# Altium PCB Kill_Board.PcbDoc
Units mil, origin at the board's own origin, x right, y up, seen from the top; angles counter-clockwise.
Board outline 3085 x 2870 mil, 2 copper layers (Top Layer, Bottom Layer); 86 components, 63 nets, 303 pads, 77 vias.
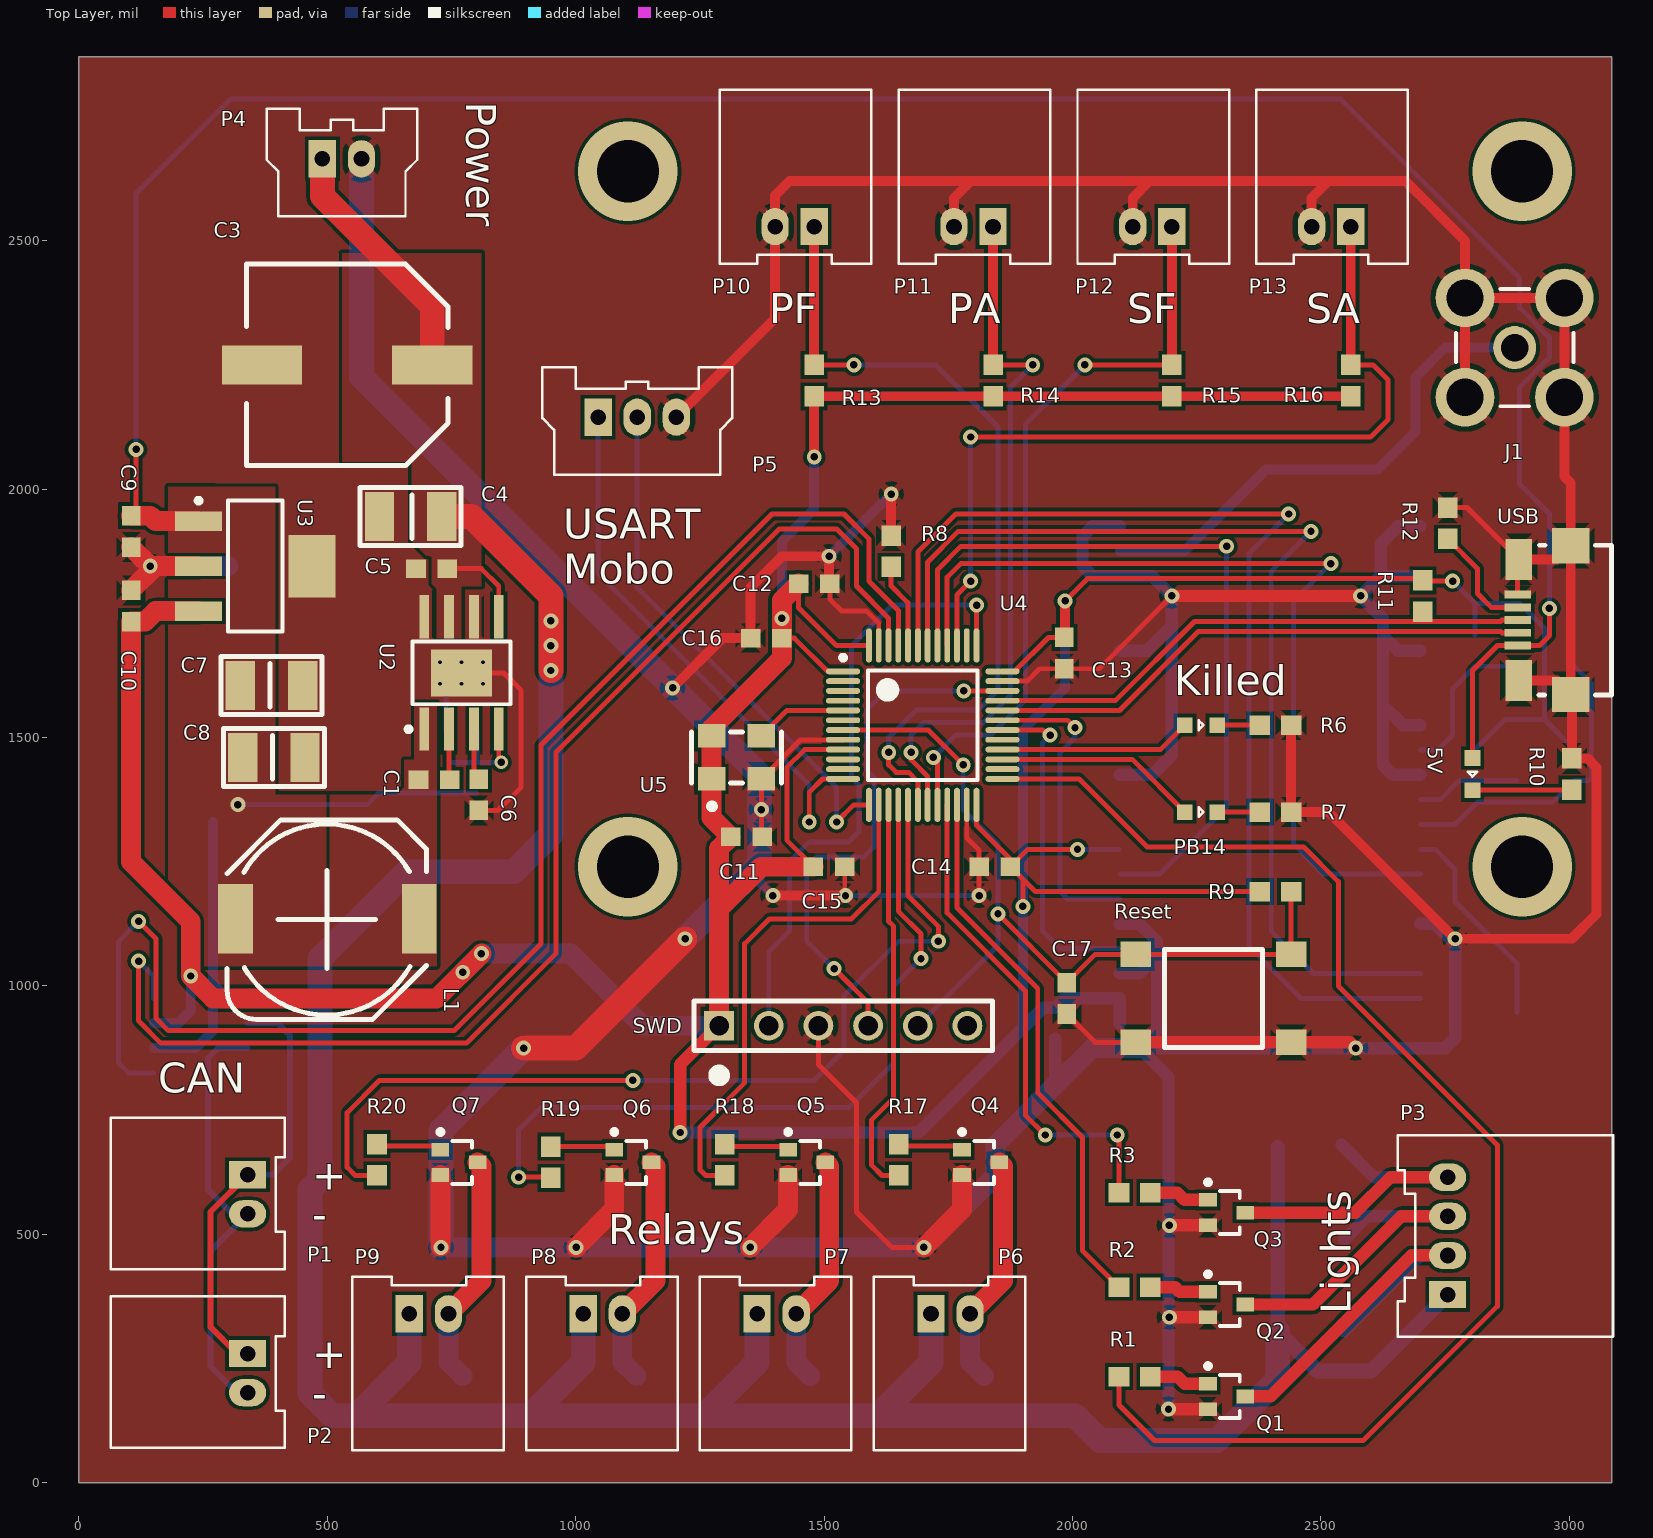
[diagram p0: Top Layer view]
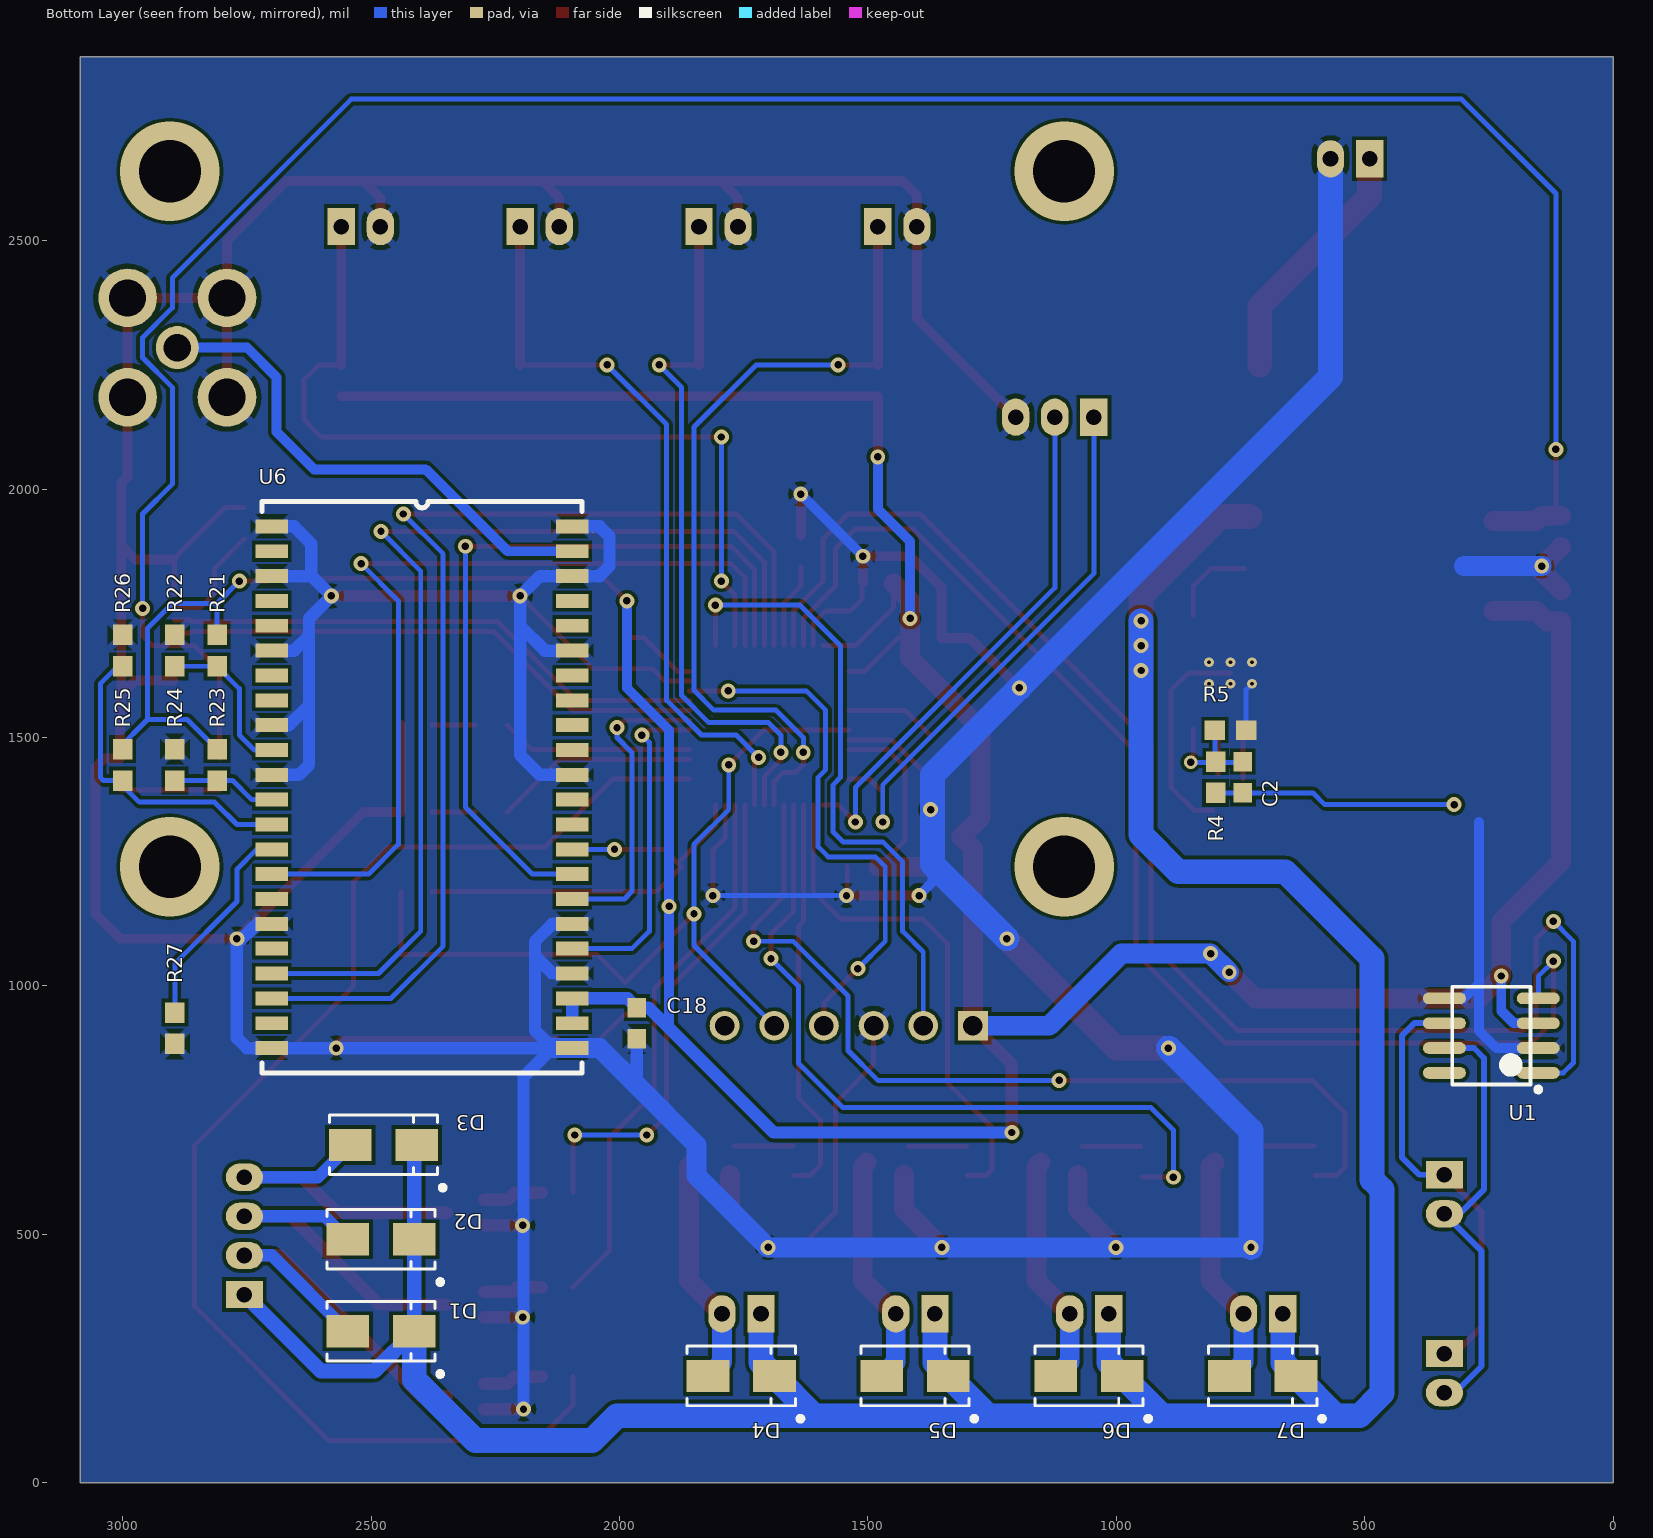
[diagram p1: Bottom Layer view, seen from below]

## Layer stack, top to bottom
Top Solder: solder mask 0.4, Solder Resist, Dk 3.5
Top Layer: signal copper 1.4
Dielectric 1: dielectric 12.6, FR-4, Dk 4.8
Bottom Layer: signal copper 1.4
Bottom Solder: solder mask 0.4, Solder Resist, Dk 3.5

## Board outline
0,0 0,2870 3085,2870 3085,0

## Design rules (kind name [scope] priority, off if disabled: settings)
Clearance [All] p1: gap=7
DiffPairsRouting [All] p1: maxlimit=10 minlimit=10 mostfreqgap=10 toplayer_minwidth=10 toplayer_maxwidth=20 toplayer_prefwidth=10 bottomlayer_minwidth=10 bottomlayer_maxwidth=20 bottomlayer_prefwidth=10 maxuncoupledlength=500
PolygonConnect [All] p1: connectstyle=Relief reliefconductorwidth=15 reliefentries=4 polygonreliefangle="45 Angle" airgapwidth=10
RoutingVias [All] p1: holewidth=15 width=30 viastyle="Through Hole" minholewidth=15 minwidth=30 maxholewidth=28 maxwidth=50
SolderMaskExpansion [All] p1: expansion=4
Width [All] p1: maxlimit=50 minlimit=10 preferedwidth=10
29 further rules are at their usual default settings.

## Classes and differential pairs
component class U_Relays: D4 D5 D6 D7 P6 P7 P8 P9 Q4 Q5 Q6 Q7 R17 R18 R19 R20
component class U_Processor: 5V C11 C12 C13 C14 C15 C16 C17 Killed PB14 R6 R7 R8 R9 R10 R11 R12 Reset SWD U4 U5 USB
component class U_Power: C1 C2 C3 C4 C5 C6 C7 C8 C9 C10 L1 P4 R4 R5 U2 U3
component class U_Linx: C18 J1 R21 R22 R23 R24 R25 R26 R27 U6
component class U_Lights: D1 D2 D3 P3 Q1 Q2 Q3 R1 R2 R3
component class U_CAN: P1 P2 U1
component class Kill_Board_Top: P5 P10 P11 P12 P13 R13 R14 R15 R16
differential pair USB: +USB_P -USB_N

## Components (designator, comment, footprint, x,y, rotation, side; value= is the part's Value field where it differs from the comment)
5V "LED" LED0603 2805,1426.5 r270 top
C1 "Cap" CAPC0603 715,1415 r180 top
C2 "Cap" CAPC0603 745,1420 r90 bottom
C3 "EEHZA1H101P" EEHZA1H101P 540,2250 r270 top
C4 "Cap" CAP1210 730.98,1945 r0 top
C5 "Cap" CAPC0603 710,1840 r180 top
C6 "Cap" CAPC0603 805,1385 r270 top
C7 "Cap" CAP1210 324.21,1605 r180 top
C8 "Cap" CAP1210 329.02,1460 r180 top
C9 "Cap" CAPC0603 105,1915 r270 top
C10 "Cap" CAPC0603 105,1765 r90 top
C11 "Cap" CAPC0603 1343.5,1300 r0 top
C12 "Cap" CAPC0603 1480,1810 r180 top
C13 "Cap" CAPC0603 1983.5,1670 r270 top
C14 "Cap" CAPC0603 1843.5,1240 r180 top
C15 "Cap" CAPC0603 1510,1240 r0 top
C16 "Cap" CAPC0603 1383.5,1700 r180 top
C17 "Cap" CAPC0603 1988.5,975 r270 top
C18 "Cap" CAPC0603 1965,925 r270 bottom
D1 "S1B-13-F" SMASeries 2480,305 r0 bottom
D2 "S1B-13-F" SMASeries 2480,490 r0 bottom
D3 "S1B-13-F" SMASeries 2475,680 r0 bottom
D4 "S1B-13-F" SMASeries 1755,215 r0 bottom
D5 "S1B-13-F" SMASeries 1405,215 r0 bottom
D6 "S1B-13-F" SMASeries 1055,215 r0 bottom
D7 "S1B-13-F" SMASeries 705,215 r0 bottom
J1 "COAX-F-LINX" MCX5.08-H5-EDITED 2890,2285 r0 top
Killed "LED" LED0603 2258.5,1525 r0 top (schematic designator "Kill Status")
L1 "MSS1048-563MLB" MSS1048-563MLB 500,1135 r270 top
P1 "2-pin Horz Sherlock" MOLEX-HDR-1X2-SHERLOCK-HORZ 339.49,620 r90 top
P2 "2-pin Horz Sherlock" MOLEX-HDR-1X2-SHERLOCK-HORZ 339.49,260 r90 top
P3 "MOLEX-HDR-1x4-SHERLOCK_RA" MOLEX-HDR-1X4-SHERLOCK-RA 2755,378.78 r270 top
P4 "2-pin Vert Sherlock" MOLEX-HDR-1X2-SHERLOCK-VERT 490,2665 r180 top
P5 "MOLEX-HDR-1x3-SHERLOCK_VERT" MOLEX-HDR-1X3-SHERLOCK-VERT 1045,2145 r180 top
P6 "2-pin Horz Sherlock" MOLEX-HDR-1X2-SHERLOCK-HORZ 1715,340 r180 top
P7 "2-pin Horz Sherlock" MOLEX-HDR-1X2-SHERLOCK-HORZ 1365,340 r180 top
P8 "2-pin Horz Sherlock" MOLEX-HDR-1X2-SHERLOCK-HORZ 1015,340 r180 top
P9 "2-pin Horz Sherlock" MOLEX-HDR-1X2-SHERLOCK-HORZ 665,340 r180 top
P10 "2-pin Horz Sherlock" MOLEX-HDR-1X2-SHERLOCK-HORZ 1480,2528.5 r0 top
P11 "2-pin Horz Sherlock" MOLEX-HDR-1X2-SHERLOCK-HORZ 1840,2528.5 r0 top
P12 "2-pin Horz Sherlock" MOLEX-HDR-1X2-SHERLOCK-HORZ 2200,2528.5 r0 top
P13 "2-pin Horz Sherlock" MOLEX-HDR-1X2-SHERLOCK-HORZ 2560,2528.5 r0 top
PB14 "LED" LED0603 2258.5,1350 r0 top
Q1 "BSN20-7" SOT-323 2310,173.78 r0 top
Q2 "BSN20-7" SOT-323 2310,358.78 r0 top
Q3 "BSN20-7" SOT-323 2310,543.78 r0 top
Q4 "BSN20-7" SOT-323 1815,645 r0 top
Q5 "BSN20-7" SOT-323 1465,645 r0 top
Q6 "BSN20-7" SOT-323 1115,645 r0 top
Q7 "BSN20-7" SOT-323 765,645 r0 top
R1 "Res" RES0603 2125,213.78 r0 top
R2 "Res" RES0603 2125,393.78 r0 top
R3 "Res" RES0603 2125,583.78 r0 top
R4 "Res" RES0603 800,1420 r90 bottom (schematic designator R1)
R5 "Res" RES0603 770,1515 r180 bottom (schematic designator R2)
R6 "Res" RES0603 2408.5,1525 r180 top
R7 "Res" RES0603 2408.5,1350 r180 top
R8 "Res" RES0603 1635,1875 r90 top
R9 "Res" RES0603 2408.5,1190 r0 top
R10 "Res" RES0603 3005,1426.5 r270 top
R11 "Res" RES0603 2705,1785 r270 top
R12 "Res" RES0603 2755,1931.5 r90 top
R13 "Res" RES0603 1480,2218.5 r270 top
R14 "Res" RES0603 1840,2218.5 r270 top
R15 "Res" RES0603 2200,2218.5 r270 top
R16 "Res" RES0603 2560,2218.5 r270 top
R17 "Res" RES0603 1650,650 r90 top
R18 "Res" RES0603 1300,650 r90 top
R19 "Res" RES0603 950,645 r90 top
R20 "Res" RES0603 600,650 r90 top
R21 "Res" RES0603 2810,1675 r90 bottom
R22 "Res" RES0603 2895,1675 r270 bottom
R23 "Res" RES0603 2810,1445 r90 bottom
R24 "Res" RES0603 2895,1445 r270 bottom
R25 "Res" RES0603 3000,1445 r90 bottom
R26 "Res" RES0603 3000,1675 r270 bottom
R27 "Res" RES0603 2895,915 r90 bottom
Reset "Button" PTS645xxxxSMTR92 2283.5,975 r180 top
SWD "SWD" SWD_STM32 1288.5,920 r90 top
U1 "SN65HVD230DR" SOIC-8pin 245,900 r0 bottom
U2 "LMR23610ADDAR" LMR23610ADDAR 770,1630 r90 top
U3 "3.3V LDO Reg" SOT23-4n 355,1845 r0 top
U4 "STM32F072CB" STM32F072CB 1698.5,1525 r0 top
U5 "636L3C008M" 636L3C 1323.5,1460 r0 top
U6 "TRM-900-NT" TRM-900-NT 2700,1925 r180 bottom
USB "USB Micro" 10118192-0001LF 2875,1736.5 r90 top

## Footprints (in the part's own frame and the unit in brackets; to place one, negate y for a bottom-side part, rotate by r counter-clockwise, add the part's x,y. Pads: shape width x height; smd on the part's side, far side on the other; paste and mask are expansions set on the pad)
636L3C [mm]
  rect 1.4x1.2 smd: 1(-1.27,-1.1) 2(1.27,-1.1) 3(1.27,1.1) 4(-1.27,1.1)
  silkscreen extent -2.3,-2.65 2.3,1.3, body extent -2.5,-1.6 2.5,1.6, height 2
10118192-0001LF [mm] "USB Micro-B Recepticle"
  rect 0.4x1.35 smd: 1(-1.3,-0.533) 2(-0.65,-0.533) 3(0,-0.533) 4(0.65,-0.533) 5(1.3,-0.533)
  rect 1.8x1.9 smd: SHD(-3.8,-3.248) SHD(3.8,-3.248)
  rect 2.1x1.35 smd: SHD(-3.1,-0.584) SHD(3.1,-0.598)
  silkscreen extent -3.82,-5.33 3.82,-1.63, body extent -3.96,-5.98 3.96,-0.32, height 3.09
CAP1210 [mm]
  rect 1.5x2.5 smd: 1(-0.02,0) 2(-3.2,0)
  silkscreen extent -4.2,-1.48 0.97,1.48, body extent -3.22,-1.25 0,1.26, height 2.5
CAPC0603 [mm] "Chip Capacitor, 2-Leads, Body 1.60x0.80mm, IPC Medium Density"
  rect 1x0.95 smd: 1(-0.8,0) 2(0.8,0)
  body extent -0.88,-0.48 0.87,0.48, height 0.8
EEHZA1H101P [mm] "CAP ALUM POLY HYB 100UF 50V SMD"
  rect 2x4.1 smd: 1(0,4.35) 2(0,-4.35)
  silkscreen extent -5.15,-5.15 5.15,5.15, body extent -5.24,-5.99 5.25,5.99, height 10.54
LED0603 [mm] "Chip LED, 2-Leads, Body 1.60x0.80mm, IPC Medium Density"
  rect 0.8x0.8 smd: A(-0.825,0) C(0.825,0)
  silkscreen extent -0.13,-0.25 0.13,0.25, body extent -0.88,-0.48 0.87,0.47, height 0.8
LMR23610ADDAR [mm] "IC REG BUCK ADJ 1A SYNC 8SOPWRPD"
  rect 2.2x0.5 smd: 1(-2.875,1.905) 2(-2.875,0.635) 3(-2.875,-0.635) 4(-2.875,-1.905) 5(2.875,-1.905) 6(2.875,-0.635) 7(2.875,0.635) 8(2.875,1.905)
  rect 2.4x3.1 smd: 9(0,0)
  silkscreen extent -3,-2.5 1.6,2.83, body extent -2,-2.5 2,2.5, height 1.7
MCX5.08-H5-EDITED [mm] "Connector; RF Coaxial, MCX, Thru-Hole; 5 Position; Edited for hole size 0.2mm larger"
  round 2.2 hole 1.4: 1(0,0)
  round 3 hole 1.9: 2(-2.54,-2.54) 3(2.54,-2.54) 4(2.54,2.54) 5(-2.54,2.54)
  silkscreen extent -3,-3 3,3
MOLEX-HDR-1X2-SHERLOCK-HORZ [mm]
  rect 1.397x1.905 hole 0.8: 1(0,0)
  oval 1.397x1.905 hole 0.8: 2(-2,0)
  silkscreen extent -4.83,-1.9 2.92,6.99, body extent -4.83,-1.91 2.87,8.59, height 5.54
MOLEX-HDR-1X2-SHERLOCK-VERT [mm]
  rect 1.397x1.905 hole 0.8: 1(0,0)
  oval 1.397x1.905 hole 0.8: 2(-2,0)
  silkscreen extent -4.85,-2.55 2.85,2.95, body extent -4.87,-2.59 2.83,2.96, height 8.5
MOLEX-HDR-1X3-SHERLOCK-VERT [mm]
  rect 1.397x1.905 hole 0.8: 1(0,0)
  oval 1.397x1.905 hole 0.8: 2(-2,0) 3(-4,0)
  silkscreen extent -6.85,-2.55 2.85,2.95, body extent -6.88,-2.57 2.82,2.98, height 8.57
MOLEX-HDR-1X4-SHERLOCK-RA [mm]
  rect 1.397x1.905 hole 0.8: 1(0,0)
  oval 1.397x1.905 hole 0.8: 2(-2,0) 3(-4,0) 4(-6,0)
  silkscreen extent -8.15,-2.55 2.15,8.46, body extent -8.17,-1.98 2.13,8.52, height 5.54
MSS1048-563MLB [mm] "FIXED IND 56UH 1.7A 126 MOHM"
  rect 3.56x1.78 smd: 1(0,4.7) 2(0,-4.7)
  silkscreen extent -5.06,-5.13 5.14,5.07, body extent -5.1,-5.15 5.1,5.15, height 5
PTS645xxxxSMTR92 [mm] "PTS645 Series SMT 6 mm Tactile Switch"
  rect 1.555x1.3 smd: A(-3.975,2.25) A(3.975,2.25) B(-3.975,-2.25) B(3.975,-2.25)
  silkscreen extent -2.5,-2.5 2.5,2.5, body extent -3,-3 3,3, height 4.5
RES0603 [mm] "Chip Resistor, 2-Leads, Body 1.60x0.80mm, IPC Medium Density"
  rect 1.05x1 smd: 1(-0.8,0) 2(0.8,0)
  body extent -0.88,-0.48 0.87,0.47, height 0.8
SMASeries [mil]
  rect 86x65 smd: A(67,0) C(-67,0)
  silkscreen extent -124,-60 109,91, body extent -104,-55 104,55, height 92
SOIC-8pin [mm] "For 296-1345-1-ND"
  oval 2.2x0.6 smd: 1(-2.4,1.905) 2(-2.4,0.635) 3(-2.4,-0.635) 4(-2.4,-1.905) 5(2.4,-1.905) 6(2.4,-0.635) 7(2.4,0.635) 8(2.4,1.905)
  silkscreen extent -2.52,-2.5 2,2.88, body extent -2,-2.5 2,2.5, height 1.75
SOT23-4n [mm] "SOT223, 4-Leads, Body 6.50x7.00mm (avg), Pitch 2.30mm, IPC Medium Density"
  rect 2.4x1 smd: 1(-2.9,2.3) 2(-2.9,0) 3(-2.9,-2.3)
  rect 2.4x3.2 smd: 4(2.9,0)
  silkscreen extent -3.02,-3.35 1.4,3.47, body extent -1.85,-3.35 1.85,3.35, height 1.7
SOT-323 [mm] "SOT23, 3-Leads, Body 2.00x2.20mm, Pitch 0.65mm, IPC Medium Density"
  rect 0.9x0.7 smd: 1(-0.95,0.65) 2(-0.95,-0.65) 3(0.95,0)
  silkscreen extent -1.07,-1.1 0.67,1.67, body extent -0.67,-1.1 0.67,1.1, height 1
STM32F072CB [mm] "TSQFP, 48-Leads, Body 7.00x7.00mm, Pitch 0.50mm, IPC Medium Density"
  oval 1.75x0.3 smd: 1(-4.075,2.75) 2(-4.075,2.25) 3(-4.075,1.75) 4(-4.075,1.25) 5(-4.075,0.75) 6(-4.075,0.25) 7(-4.075,-0.25) 8(-4.075,-0.75) 9(-4.075,-1.25) 10(-4.075,-1.75) 11(-4.075,-2.25) 12(-4.075,-2.75) 25(4.075,-2.75) 26(4.075,-2.25) 27(4.075,-1.75) 28(4.075,-1.25) 29(4.075,-0.75) 30(4.075,-0.25) 31(4.075,0.25) 32(4.075,0.75) 33(4.075,1.25) 34(4.075,1.75) 35(4.075,2.25) 36(4.075,2.75)
  oval 0.3x1.75 smd: 13(-2.75,-4.075) 14(-2.25,-4.075) 15(-1.75,-4.075) 16(-1.25,-4.075) 17(-0.75,-4.075) 18(-0.25,-4.075) 19(0.25,-4.075) 20(0.75,-4.075) 21(1.25,-4.075) 22(1.75,-4.075) 23(2.25,-4.075) 24(2.75,-4.075) 37(2.75,4.075) 38(2.25,4.075) 39(1.75,4.075) 40(1.25,4.075) 41(0.75,4.075) 42(0.25,4.075) 43(-0.25,4.075) 44(-0.75,4.075) 45(-1.25,4.075) 46(-1.75,4.075) 47(-2.25,4.075) 48(-2.75,4.075)
  silkscreen extent -4.2,-2.8 2.8,3.57, body extent -3.5,-3.5 3.5,3.5, height 1.6
SWD_STM32 [mil] "SWD connector matching the pinout on STM Discovery Boards"
  rect 60x60 hole 39.37: 1(0,0)
  round 60 hole 39.37: 2(0,-100) 3(0,-200) 4(0,-300) 5(0,-400) 6(0,-500)
  silkscreen extent -110,-550 50,50
TRM-900-NT [mil] "RF TXRX MODULE ISM<1GHZ"
  rect 65x28 smd: 1(0,0) 2(0,-50) 3(0,-100) 4(0,-150) 5(0,-200) 6(0,-250) 7(0,-300) 8(0,-350) 9(0,-400) 10(0,-450) 11(0,-500) 12(0,-550) 13(0,-600) 14(0,-650) 15(0,-700) 16(0,-750) 17(0,-800) 18(0,-850) 19(0,-900) 20(0,-950) 21(0,-1000) 22(0,-1050) 23(605,-1050) 24(605,-1000) 25(605,-950) 26(605,-900) 27(605,-850) 28(605,-800) 29(605,-750) 30(605,-700) 31(605,-650) 32(605,-600) 33(605,-550) 34(605,-500) 35(605,-450) 36(605,-400) 37(605,-350) 38(605,-300) 39(605,-250) 40(605,-200) 41(605,-150) 42(605,-100) 43(605,-50) 44(605,0)
  silkscreen extent -20,-1100 625,50

## Part data
C3: "CAP ALUM POLY HYB 100UF 50V SMD"
D1 D2 D3 D4 D5 D6 D7: library part Diode, "Standard Diode Template"
J1: "RF Coaxial PCB Connector, MCX; Thru-Hole, Right-Angle Mount Socket, Blunt Post Terminal, 50 Ohm Impedance, Edited for 0.2mm larger holes"
L1: "FIXED IND 56UH 1.7A 126 MOHM"
P1 P2 P6 P7 P8 P9 P10 P11 P12 P13: library part MOLEX-HDR-1x2-SHERLOCK_RA, "Header, Molex, 2mm Pitch Sherlock Header, Single Row, Horizontal, 2 Circuits, Length 3.3mm,  0353630260"
P3: "Header, Molex, 2mm Pitch Sherlock Header, Single Row, Horizontal, 4 Circuits, Length 3.3mm"
P4: library part MOLEX-HDR-1x2-SHERLOCK_VERT, "Header, Molex, 2mm Pitch Sherlock Header, Single Row, Vertical, 2 Circuits, Length 3.3mm, 0353620250"
P5: "Header, Molex, 2mm Pitch Sherlock Header, Single Row, Vertical, 3 Circuits, Length 3.3mm, 0353620376"
Q1 Q2 Q3 Q4 Q5 Q6 Q7: library part NMOSFET, "NMOSFET Template"
Reset: "SPST Button"
SWD: library part SWD_STM32, "SWD connector matching the pinout on STM Discovery Boards"
U1: "IC TXRX CAN 1MBPS 3.3V 8SOIC"
U2: "IC REG BUCK ADJ 1A SYNC 8SOPWRPD"
U3: library part LM3940IMPX-3.3, "IC REG LDO 3.3V 1A SOT223"
U4: "MCU 32BIT 128KB FLASH 48LQFP"
U5: library part 636L3C, "HCMOS/TTL Clock Oscillator"
U6: "RF TXRX MODULE ISM<1GHZ"
USB: "USB Mini B Metal Shield SMT"

## Via types
v1: diameter 30, hole 15, Top Layer to Bottom Layer, 66 vias
v2: diameter 19.68, hole 7.87, Top Layer to Bottom Layer, 6 vias
v3: diameter 200, hole 125, Top Layer to Bottom Layer, 4 vias
v4: diameter 27, hole 15, Top Layer to Bottom Layer, 1 vias

## Nets (pads, with @x,y where several pads share a name; then routed paths per layer and width w, separated by ;. In a path a pad name is that pad's centre, name@x,y a point inside that pad or via, vN(x,y) a via of type N, cw(c..) or ccw(c..) an arc to the next point about the centre after c; other vN are vias at no path point)
3V3: C10.1 C11.1 C12.2 C13.1 C14.1 C15.1 C16.1 C18.1 R9.1 R11.1 R13.2 R14.2 R15.2 R16.2 R21.2 R23.2 R25.2 SWD.1 U1.3 U3.3 U4.1 U4.9 U4.24 U4.36 U4.48 U5.1 U5.4 U6.24 U6.25 U6.31 | length 10702.9
  Top Layer w10: C16.1 1440,1700 1506.73,1633.27 U4.1 ; C12.2 1448.5,1761.5 1524.57,1685.43 U4.48 ; C15.1 1425,1293.5 1425,1440 1460.79,1475.79 U4.9 ; U4.24 1806.77,1323.23 C14.1@1875,1255 ; U4.36 1883.27,1633.27 1951.5,1701.5 C13.1 ; v1(1900,1160) 1900,1215 ; v1(1985,1775) 2030,1820 R11.1@2705,1820 ; v1(2010,1275) 1910,1275 C14.1 1925,1190 R9.1 ; R11.1@2706.5,1815 v1(2765,1815)
  Top Layer w20: v1(1480,2065) R13.2 R14.2 R15.2 R16.2 ; C13.1@1985,1702.99 v1(1985,1775)
  Top Layer w25: v1(1210,705) 1210,841.5 SWD.1
  Top Layer w40: U3.3 154.45,1754.45 133.5,1733.5 C10.1 105,1250 225,1130 v1(225,1020) 270,975 720,975 v1(810,1065) ; SWD.1 1288.5,1155 ; C12.2 1415,1776.5 v1(1415,1740) C16.1 1415,1660 1273.5,1518.5 U5.4 U5.1 1273.5,1338.5 C11.1 1288.5,1276.5 1288.5,1155 ; C15.1 1373.5,1240 1288.5,1155
  Bottom Layer w10: v1(2010,1275) U6.31 ; v1(2765,1815) 2810,1770 ; R23.2 2870,1536.5 2950,1536.5 ; R21.2 2810,1770 ; R25.2@3010,1476.5 2950,1536.5 ; 2810,1770 2900,1770 2950,1720 2950,1536.5
  Bottom Layer w20: U1.3 200,925 225,950 v1(225,1020) ; v1(1415,1740) 1415,1895 1480,1960 v1(1480,2065) ; 1875,890 1900,915 v1(1900,1160) 1900,1515 1985,1600 v1(1985,1775)
  Bottom Layer w25: v1(1210,705) 1690,705 1875,890 1941.5,956.5 C18.1 1983.5,975 U6.25 U6.24
  Bottom Layer w40: v1(772.5,1027.5) v1(810,1065) 990,1065 1135,920 SWD.1
5V: 5V.A C2.1 C7.1 C8.1 C9.1 L1.2 R4.1 U3.1 USB.1 | length 5436
  Top Layer w10: C9.1@115,1956.5 v1(115,2080) ; 5V.A 2805,1635 2855.31,1685.31 USB.1 2940.31,1685.31 2960,1705 v1(2960,1760)
  Top Layer w40: C9.1 143.5,1946.5 154.45,1935.55 U3.1
  Bottom Layer w10: v1(115,2080) 115,2595 305,2785 2540,2785 2900,2425 2900,2365 2960,2305 2960,2265 2900,2205 2900,2010 2960,1950 v1(2960,1760) ; v1(320,1365) 580,1365 603.5,1388.5 C2.1 R4.1
24V: C3.1 C4.1 C5.1 D1.C D2.C D3.C D4.C D5.C D6.C D7.C P3.1 P4.1 P6.1 P7.1 P8.1 P9.1 U2.5 U2.7 | length 6994.3
  Top Layer w10: C5.1 810,1840 845,1805 U2.5@845,1744.69
  Top Layer w50: P4.1 490,2590 711.26,2368.74 C3.1 ; C4.1 790,1945 950,1785 v1(950,1635) v1(950,1685)
  Bottom Layer w30: D3.C@2413,675 D2.C D1.C 2493,225 2601.22,225 P3.1
  Bottom Layer w50: P9.1 665,242 D7.C 558,135 ; v1(950,1735) 950,1305 875,1230 660,1230 485,1055 485,610 465,590 465,180 510,135 558,135 ; P8.1 1015,242 D6.C 908,135 ; P7.1 1365,242 D5.C 1258,135 ; P6.1 1715,242 D4.C 1608,135 ; D1.C 2413,208 2290,85 2055,85 2005,135 1608,135 ; 558,135 908,135 ; 908,135 1258,135 ; 1258,135 1608,135
BLACK: D1.A P3.2 Q1.3 | length 796.3
  Top Layer w25: Q1.3 2398.78,173.78 2682.52,457.52 P3.2
  Bottom Layer w25: D1.A 2699.52,457.52 P3.2
BROWN: D2.A P3.3 Q2.3 | length 708.3
  Top Layer w25: Q2.3 2483.78,358.78 2661.26,536.26 P3.3
  Bottom Layer w25: D2.A 2593.26,536.26 P3.3
CHN_SEL0: R21.1 R22.2 U6.10 | length 319.6
  Bottom Layer w10: U6.10 2735,1475 2765,1505 2765,1598.5 R21.1 R22.2
CHN_SEL1: R23.1 R24.2 U6.12 | length 210.9
  Bottom Layer w10: U6.12 2740,1375 2778.5,1413.5 R24.2
CHN_SEL2: R25.1 R26.2 U6.13 | length 622.4
  Bottom Layer w10: U6.13 2770,1325 2815,1370 2966.5,1370 3010,1413.5 3038.5,1413.5 3045,1420 3045,1608.5 R26.2@3010,1643.5
CLK8MHZ: U4.5 U5.3 | length 185.8
  Top Layer w10: U5.3 1424.72,1554.53 U4.5
GND: C3.2 C4.2 C5.2 C6.2 C7.2 C8.2 C9.2 C10.2 C11.2 C12.1 C13.2 C14.2 C15.2 C16.2 C17.2 C18.2 J1.2 J1.3 J1.4 J1.5 P4.2 P5.3 P10.2 P11.2 P12.2 P13.2 Q1.2 Q2.2 Q3.2 Q4.2 Q5.2 Q6.2 Q7.2 R5.2 R6.1 R7.1 R8.2 R10.1 R12.2 R22.1 R24.1 R26.1 R27.1 Reset.A SWD.3 U1.2 U1.5 U2.6 U2.8 U2.9 U3.2 U3.4 U4.8 U4.23 U4.35 U4.47 U5.2 U6.1 U6.3 U6.6 U6.9 U6.11 U6.17 U6.22 U6.23 U6.26 U6.28 U6.34 U6.39 U6.42 U6.44 USB.5 USB.SHD | length 20523.9
  Top Layer w10: U2.9 855,1630 890,1595 890,1400 843.5,1353.5 C6.2 ; C11.2@1373.5,1301.5 U5.2 1452.28,1495.47 U4.8 ; SWD.3 1488.5,841.5 1565,765 1565,545 1636.22,473.78 v1(1700.91,473.78) ; C12.1 1511.5,1778.5 1535,1755 1585,1755 1609.92,1730.08 U4.47 ; C15.2 1541.5,1183.5 v1(1542.99,1182.01) ; U4.23 1787.09,1297.91 1812.01,1272.99 C14.2 v1(1812.01,1182.01) ; U4.35 1908.58,1613.58 1933.5,1638.5 C13.2 2053.5,1638.5 v1(2200,1785) ; C17.2 2045.59,886.42 Reset.A@2127.01,886.42 ; R12.2 2794.11,1962.99 USB.SHD@2898.56,1858.54 ; USB.5 USB.SHD@2896,1855.98
  Top Layer w20: v1(1195,1600) 1295,1700 C16.2 1352.01,1802.01 1415,1865 v1(1510,1865) C12.1@1510,1811.5 ; P5.3 1401.26,2343.78 P10.2 1401.26,2591.26 1430,2620 1795,2620 ; v1(1397.01,1182.01) v1(1542.99,1182.01) ; R8.2 v1(1635,1990) ; P11.2 1761.26,2586.26 1795,2620 ; P12.2 2121.26,2586.26 2155,2620 ; R6.1 R7.1 2515,1350 v1(2770,1095) 3005,1095 3055,1145 3055,1440 3037.01,1457.99 R10.1 3005,1584.78 USB.SHD@3002.89,1586.89 ; P13.2 2481.26,2586.26 2515,2620 ; J1.2 J1.5 ; USB.SHD@2898,1614.45 2975.33,1614.45 USB.SHD@3002.89,1586.89 ; USB.SHD@2898.56,1858.54 2975.33,1858.54 USB.SHD@3002.89,1886.1 ; 1795,2620 2155,2620 ; 2155,2620 2515,2620 ; 2515,2620 2670,2620 2790,2500 J1.5 ; J1.5 J1.4 J1.3 2990,2025 3002.89,2012.11 USB.SHD@3002.89,1886.1 ; USB.SHD@3002.89,1586.89 USB.SHD@3002.89,1886.1
  Top Layer w25: Reset.A@2127.01,886.42 2440,886.42 2558.58,886.42 v1(2570,875) ; v1(2193.19,148.19) Q1.2 ; v1(2195,333.19) Q2.2 ; v1(2195,518.19) Q3.2 ; v1(2200,1785) v1(2580,1785)
  Top Layer w40: C10.2 v1@153.5,1845 ; C9.2 v1(143.5,1845) U3.2 ; v1@727.6,474.96 Q7.2 ; v1(1000.91,473.78) 1077.6,550.47 Q6.2 ; v1(1350.91,473.78) 1427.6,550.47 Q5.2 ; v1(1700.91,473.78) 1777.6,550.47 Q4.2
  Top Layer w50: v1(895,875) 1000,875 v1(1220,1095)
  Bottom Layer w8: v2@726.69,1609.84 v2@727.44,1609.09 ; R5.2 738.5,1598.03
  Bottom Layer w10: v2(726.69,1608.35) 738.5,1596.53 R5.2 ; v1(1542.99,1182.01) v1(1812.01,1182.01)
  Bottom Layer w20: U1.2 235,875 270,910 270,1005 ; 270,1330 270,1005 ; U1.5 300,975 270,1005 ; 1370,1245 1370,1209.02 v1(1397.01,1182.01) ; v1(1510,1865) v1(1635,1990)
  Bottom Layer w25: 1965,800 C18.2 ; U6.26 2135,1025 2170,1060 ; U6.28 2135,1125 2170,1090 2170,1060 ; U6.34 2160,1425 2200,1465 2200,1725 ; U6.39 2150,1675 2200,1725 ; U6.44 2040,1925 2020,1905 2020,1845 2040,1825 U6.42 2160,1825 v1(2200,1785) 2200,1725 ; v1(2193.19,148.19) 2193.19,816.81 2135,875 ; U6.17 2730,1125 2770,1085 2770,895 2750,875 U6.22 v1(2570,875) 2135,875 ; U6.11 2645,1425 2625,1445 2625,1565 ; U6.9 2665,1525 2625,1565 ; U6.6 2655,1675 2625,1705 ; U6.3 2620,1825 ; U6.1 2655,1925 2620,1890 2620,1825 ; 2135,875 2170,910 2170,1060 ; 2620,1825 v1(2580,1785) 2625,1740 2625,1705 ; 2625,1565 2625,1705
  Bottom Layer w40: v1(143.5,1845) 300,1845 ; v1(728.78,473.78) v1(1000.91,473.78) v1(1350.91,473.78) v1(1700.91,473.78) 1845,617.87 1845,680 1965,800 2040,875 U6.23 2135,875
  Bottom Layer w50: P4.2 568.74,2226.26 v1(1195,1600) 1370,1425 1370,1245 v1(1220,1095) ; v1(728.78,473.78) 728.78,708.78 v1(895,875)
  other v1: 1373.5,1355
  other v2: 770,1608.35 813.31,1608.35 726.69,1651.65 770,1651.65 813.31,1651.65
KILLSWITCH_PA: P11.1 R14.1 U4.19 | length 1429.5
  Top Layer w10: v1(1675,1470) 1675,1455 1708.35,1421.65 U4.19 ; R14.1 v1(1920,2250)
  Top Layer w20: R14.1 P11.1
  Bottom Layer w10: v1(1675,1470) 1675,1505 1700,1530 1820,1530 1875,1585 1875,2205 v1(1920,2250)
KILLSWITCH_PF: P10.1 R13.1 U4.18 | length 1664
  Top Layer w10: R13.1 v1(1560,2250) ; v1(1630,1470) 1630,1445 1645,1430 1670,1430 1688.66,1411.34 U4.18
  Top Layer w20: R13.1 P10.1
  Bottom Layer w10: v1(1560,2250) 1725,2250 1850,2125 1850,1595 1810,1555 1685,1555 1630,1500 v1(1630,1470)
KILLSWITCH_SA: P13.1 R16.1 U4.39 | length 1731.4
  Top Layer w10: U4.39 1767.4,1787.4 v1(1795,1815) ; v1(1795,2105) 2600,2105 2635,2140 2635,2220 2605,2250 R16.1
  Top Layer w20: R16.1 P13.1
  Bottom Layer w10: v1(1795,1815) v1(1795,2105)
KILLSWITCH_SF: P12.1 R15.1 U4.20 | length 1509.6
  Top Layer w10: v1(1720,1460) 1728.03,1451.97 U4.20 ; v1(2025,2250) R15.1
  Top Layer w20: R15.1 P12.1
  Bottom Layer w10: v1(1720,1460) 1765,1505 1835,1505 1905,1575 1905,2130 v1(2025,2250)
LVL_ADJ: R27.2 U6.14 | length 426.8
  Bottom Layer w10: U6.14 2730,1275 2770,1235 2770,1170 2895,1045 R27.2
Net5V_C: 5V.C R10.2 | length 199
  Top Layer w10: 5V.C R10.2@3004.02,1394.02
NetC1_1: C1.1 U2.2 | length 101.8
  Top Layer w8: U2.2 U2.2@745,1518.31
  Top Layer w10: C1.1@745,1416.5 U2.2
NetC1_2: C1.2 L1.1 U2.1
NetC2_2: C2.2 R4.2 R5.1 U2.4 | length 233.1
  Top Layer w8: U2.4 U2.4@845,1518.31
  Top Layer w10: v4@845,1455 U2.4
  Bottom Layer w10: C2.2@746.5,1450 R4.2@804.49,1450 ; R5.1 801.5,1452.99 R4.2@804.49,1450 ; v4(850,1450) R4.2@804.49,1450
NetC6_1: C6.1 U2.3 | length 91.8
  Top Layer w8: U2.3 U2.3@795,1518.31
  Top Layer w10: C6.1@795,1426.5 U2.3
NetD4_A: D4.A P6.2 Q4.3 | length 472.5
  Top Layer w40: P6.2 1860.28,406.54 1860.28,637.13 Q4.3
  Bottom Layer w40: P6.2 1793.74,243.26 D4.A
NetD5_A: D5.A P7.2 Q5.3 | length 472.5
  Top Layer w40: P7.2 1510.28,406.54 1510.28,637.13 Q5.3
  Bottom Layer w40: P7.2 1443.74,243.26 D5.A
NetD6_A: D6.A P8.2 Q6.3 | length 472.5
  Top Layer w40: P8.2 1160.28,406.54 1160.28,637.13 Q6.3
  Bottom Layer w40: P8.2 1093.74,243.26 D6.A
NetD7_A: D7.A P9.2 Q7.3 | length 472.5
  Top Layer w40: P9.2 810.28,406.54 810.28,637.13 Q7.3
  Bottom Layer w40: P9.2 743.74,243.26 D7.A
NetJ1_1: J1.1 U6.43 | length 1029.3
  Bottom Layer w20: U6.43 2225,1875 2390,2040 2615,2040 2690,2115 2690,2225 2750,2285 J1.1
NetKilled_A: Killed.A U4.28 | length 387.5
  Top Layer w10: U4.28 2176.81,1475.79 Killed.A
NetKilled_C: Killed.C R6.2 | length 86
  Top Layer w10: Killed.C R6.2
NetP1_1: P1.1 P2.1 U1.6 | length 875.5
  Top Layer w12: P2.1 318.23,260 264.49,313.74 264.49,545 P1.1
  Bottom Layer w12: P1.1 390,620 425,655 425,900 400,925 U1.6
NetP1_2: P1.2 P2.2 U1.7 | length 887
  Bottom Layer w12: P2.2 318.23,181.26 264.49,235 264.49,466.26 P1.2 308.74,541.26 260,590 260,855 280,875 U1.7
NetPB14_A: PB14.A U4.27 | length 411
  Top Layer w10: U4.27 2119.92,1456.1 PB14.A
NetPB14_C: PB14.C R7.2 | length 86
  Top Layer w10: PB14.C R7.2
NetQ1_1: Q1.1 R1.2 | length 122.1
  Top Layer w25: R1.2 2211.22,213.78 2225.63,199.37 Q1.1
NetQ2_1: Q2.1 R2.2 | length 120
  Top Layer w25: R2.2 2206.22,393.78 2215.63,384.37 Q2.1
NetQ3_1: Q3.1 R3.2 | length 122.1
  Top Layer w25: R3.2 2211.22,583.78 2225.63,569.37 Q3.1
NetQ4_1: Q4.1 R17.2 | length 118.8
  Top Layer w10: R17.2@1650.91,677.4 Q4.1@1769.72,677.4
NetQ5_1: Q5.1 R18.2 | length 237.6
  Top Layer w10: R18.2@1300,676.5 1418.82,676.5 R18.2@1300,676.5
NetQ6_1: Q6.1 R19.2 | length 118.8
  Top Layer w10: R19.2 Q6.1@1068.82,676.5
NetQ7_1: Q7.1 R20.2 | length 118.8
  Top Layer w10: R20.2@600.91,677.4 Q7.1@719.72,677.4
NetR1_1: R1.1 U4.25 | length 2709.5
  Top Layer w10: U4.25 2013.27,1416.73 2150,1280 2465,1280 2535,1210 2535,1000 2855,680 2855,355 2585,85 2165,85 2093.5,156.5 R1.1
NetR2_1: R2.1 U4.22 | length 1105.9
  Top Layer w10: U4.22 1767.4,1157.6 1930,995 1930,785 2020,695 2020,467.28 R2.1
NetR3_1: R3.1 U4.21 | length 1009
  Top Layer w10: U4.21 1747.72,1147.28 1905,990 1905,740 v1(1945,700) ; v1(2090,700) 2093.5,696.5 R3.1
  Bottom Layer w10: v1(1945,700) v1(2090,700)
NetR8_1: R8.1 U4.44 | length 171.5
  Top Layer w10: R8.1 1635,1805 1668.5,1771.5 U4.44@1668.5,1685.91
NetR12_1: R12.1 USB.4 | length 227.4
  Top Layer w10: R12.1 2815,1840 2815,1790 2842.91,1762.09 USB.4
NetR17_1: R17.1 U4.15 | length 811.4
  Top Layer w10: U4.15 1629.61,1130.39 1640,1120 1640,775 1595,730 1595,640 1616.5,618.5 R17.1
NetR18_1: R18.1 U4.14 | length 1035.1
  Top Layer w10: R18.1 1261.5,618.5 1250,630 1250,715 1340,805 1340,1085 1390,1135 1555,1135 1609.92,1189.92 U4.14
NetR19_1: R19.1 U4.16 | length 1530.7
  Top Layer w10: v1(885,615) R19.1@948.5,615 ; U4.16 1649.29,1150.71 1695,1105 v1(1695,1055)
  Bottom Layer w10: v1(885,615) 885,710 930,755 1550,755 1640,845 1640,1000 v1(1695,1055)
NetR20_1: R20.1 U4.17 | length 1874
  Top Layer w10: R20.1 556.5,618.5 540,635 540,745 605,810 v1(1115,810) ; U4.17 1668.98,1181.02 1730,1120 v1(1730,1090)
  Bottom Layer w10: v1(1115,810) 1480,810 1540,870 1540,980 1650,1090 v1(1730,1090)
NetU1_1: U1.1 U4.45 | length 2960.2
  Top Layer w10: v1(120,1130) 155,1095 155,935 180,910 755,910 930,1085 930,1485 1395,1950 1540,1950 1590,1900 1590,1815 1649.29,1755.71 U4.45
  Bottom Layer w10: v1(120,1130) 80,1090 80,845 100,825 U1.1
NetU1_4: U1.4 U4.46 | length 2575.1
  Top Layer w10: v1(120,1050) 120,930 165,885 780,885 960,1065 960,1470 1410,1920 1525,1920 1565,1880 1565,1805 1629.61,1740.39 U4.46
  Bottom Layer w10: v1(120,1050) 150.51,1019.49 U1.4
NetU4_30: U4.30 U6.27 | length 671
  Top Layer w10: U4.30 1939.84,1515.16 1950,1505 v1(1955,1505)
  Bottom Layer w10: v1(1955,1505) 1940,1490 1940,1110 1975,1075 U6.27
NetU4_31: U4.31 U6.29 | length 620.8
  Top Layer w10: U4.31 1990.16,1534.84 v1(2005,1520)
  Bottom Layer w10: v1(2005,1520) 2005,1500 1975,1470 1975,1190 1990,1175 U6.29
NetU4_40: U4.40 U6.15 | length 1796.8
  Top Layer w10: U4.40 1747.72,1822.72 1775,1850 v1(2520,1850)
  Bottom Layer w10: v1(2520,1850) 2445,1775 2445,1285 2505,1225 U6.15
NetU4_41: U4.41 U6.30 | length 1549.9
  Top Layer w10: U4.41 1728.03,1838.03 1775,1885 v1(2310,1885)
  Bottom Layer w10: U6.30 2175,1225 2310,1360 v1(2310,1885)
NetU4_42: U4.42 U6.19 | length 2138.4
  Top Layer w10: U4.42 1708.35,1853.35 1770,1915 v1(2480,1915)
  Bottom Layer w10: v1(2480,1915) 2400,1835 2400,1110 2485,1025 U6.19
NetU4_43: U4.43 U6.20 | length 2257.8
  Top Layer w10: U4.43 1688.66,1873.66 1765,1950 v1(2435,1950)
  Bottom Layer w10: v1(2435,1950) 2355,1870 2355,1080 2460,975 U6.20
NRST: C17.1 R9.2 Reset.B SWD.5 U4.7 | length 1689.3
  Top Layer w10: U4.7 1709.84,1515.16 v1(1780,1445) ; v1(1850,1145) C17.1 2045.59,1063.58 2127.01,1063.58 2440,1063.58 R9.2
  Bottom Layer w10: SWD.5 1850,1081.5 1850,1285 1780,1355 v1(1780,1445)
SWCLK: SWD.2 U4.37 | length 1260.2
  Top Layer w10: U4.37 v1(1806.77,1766.77)
  Bottom Layer w10: SWD.2 1388.5,1068.5 1430,1110 1430,1250 1470,1290 1550,1290 1570,1310 1570,1405 1555,1420 1555,1685 1636.77,1766.77 v1(1806.77,1766.77)
SWDIO: SWD.4 U4.34 | length 1094
  Top Layer w10: v1(1520,1035) 1588.5,966.5 SWD.4 ; v1(1781.1,1593.9) U4.34
  Bottom Layer w10: v1(1520,1035) 1465,1090 1465,1240 1485,1260 1580,1260 1600,1280 1600,1420 1585,1435 1585,1555 1623.9,1593.9 v1(1781.1,1593.9)
USART2_RX: P5.2 U4.13 | length 1060.8
  Top Layer w10: v1(1525,1330) 1559.57,1364.57 U4.13
  Bottom Layer w10: P5.2 1123.74,1801.26 1525,1400 v1(1525,1330)
USART2_TX: P5.1 U4.12 | length 1130.2
  Top Layer w10: v1(1470,1330) 1470,1390 1496.73,1416.73 U4.12
  Bottom Layer w10: P5.1 1045,1830 1470,1405 v1(1470,1330)
USB_N: U4.32 USB.2 | length 1104.3
  Top Layer w10: U4.32 1898.39,1554.53 1898.54,1554.37 2094.37,1554.37 2253.7,1713.7 2861.63,1713.7 2864.43,1710.91 USB.2
USB_P: R11.2 U4.33 USB.3 | length 1720.5
  Top Layer w10: U4.33 1898.39,1574.21 1898.54,1574.37 2086.09,1574.37 2245.42,1733.7 ; USB.3 2864.43,1736.5 2861.63,1733.7 ; 2245.42,1733.7 2861.63,1733.7 ; 2245.42,1733.7 2861.63,1733.7
WHITE: D3.A P3.4 Q3.3 | length 677
  Top Layer w25: Q3.3 2568.78,543.78 2640,615 P3.4
  Bottom Layer w25: D3.A 2607,615 P3.4
pads on no net: SWD.6 U1.8 U4.2 U4.3 U4.4 U4.6 U4.10 U4.11 U4.26 U4.29 U4.38 U6.2 U6.4 U6.5 U6.7 U6.8 U6.16 U6.18 U6.21 U6.32 U6.33 U6.35 U6.36 U6.37 U6.38 U6.40 U6.41
copper on no net:
  other v3: 1105,1240 2905,1240 1105,2640 2905,2640

## Polygon pours and split planes (outlines as drawn)
GND on Top Layer "GND_L01_P018" (solid, remove dead copper, pour order 18): 395,1395 395,2010 275,2010 275,2475 530,2475 530,2055 660,2055 660,1890 710,1890 710,1700 770,1700 770,1805 810,1805 810,1700 870,1700 870,1565 865,1570 675,1570 675,1455 655,1455 655,1395
5V on Top Layer "5V_L01_P016" (solid, remove dead copper, pour order 16): 505,1040 180,1040 180,2005 395,2005 395,1385 505,1385
NetC1_2 on Top Layer "NETC1_2_L01_P014" (solid, remove dead copper, pour order 14): 720,1570 675,1570 675,1455 655,1455 655,1400 640,1385 505,1385 505,1040 720,1040
24V on Top Layer "24V_L01_P012" (solid, remove dead copper, pour order 12): 770,1700 720,1700 720,1800 710,1810 710,1865 700,1865 670,1895 670,2055 530,2055 530,2475 810,2475 810,1805 770,1805
GND on Top Layer "GND_L01_P024" (solid, pour order 24): 0,0 0,2870 3085,2870 3085,0
GND on Bottom Layer "GND_L02_P022" (solid, remove dead copper, pour order 22): 195,2465 195,1305 865,1305 865,2465
GND on Bottom Layer "GND_L02_P026" (solid, pour order 26): 0,0 3085,0 3085,2870 0,2870

## Silkscreen, mask and mechanical layers (free items; w line width, h text height)
Top Overlay:
  text "Power" at 780,2780 h60 r270
  text "PF" at 1390,2333.5 h60
  text "PA" at 1750,2333.5 h60
  text "SF" at 2110,2333.5 h60
  text "SA" at 2470,2333.5 h60
  text "USART / Mobo" at 975,1810 h60
  text "CAN" at 159.49,785 h60
  text "+" at 469.49,590 h60
  text "-" at 469.49,510 h60
  text "Relays" at 1065,480 h60
  text "Lights" at 2560,338.78 h60 r90
  text "+" at 469.49,230 h60
  text "-" at 469.49,150 h60
Mechanical 2:
  the board outline again, w10